# Altium PCB PCB1.PcbDoc
Units mm, origin at the board's own origin, x right, y up, seen from the top; angles counter-clockwise.
Board outline 180.72 x 140.08 mm, 2 copper layers (Top Layer, Bottom Layer); 78 components, 85 nets, 278 pads, 29 vias.
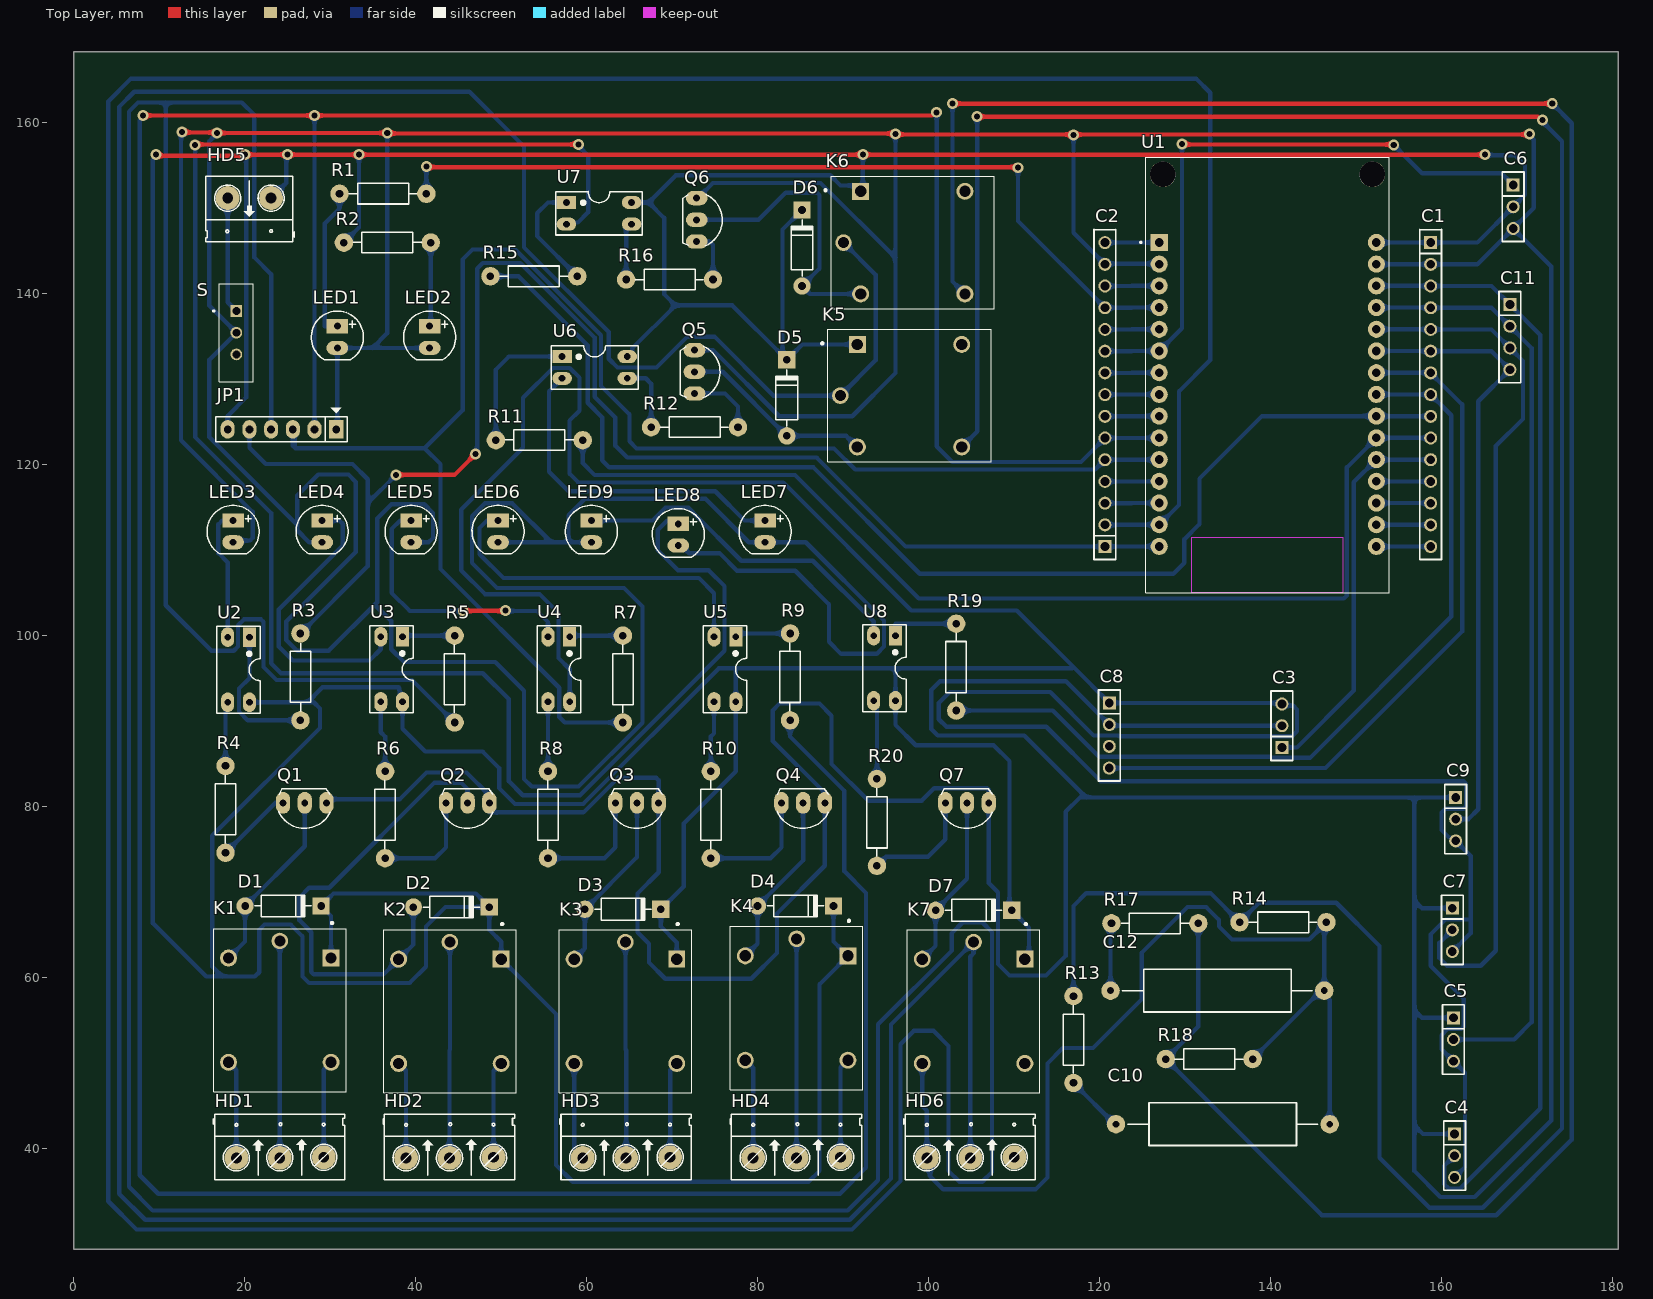
[diagram p0: Top Layer view]
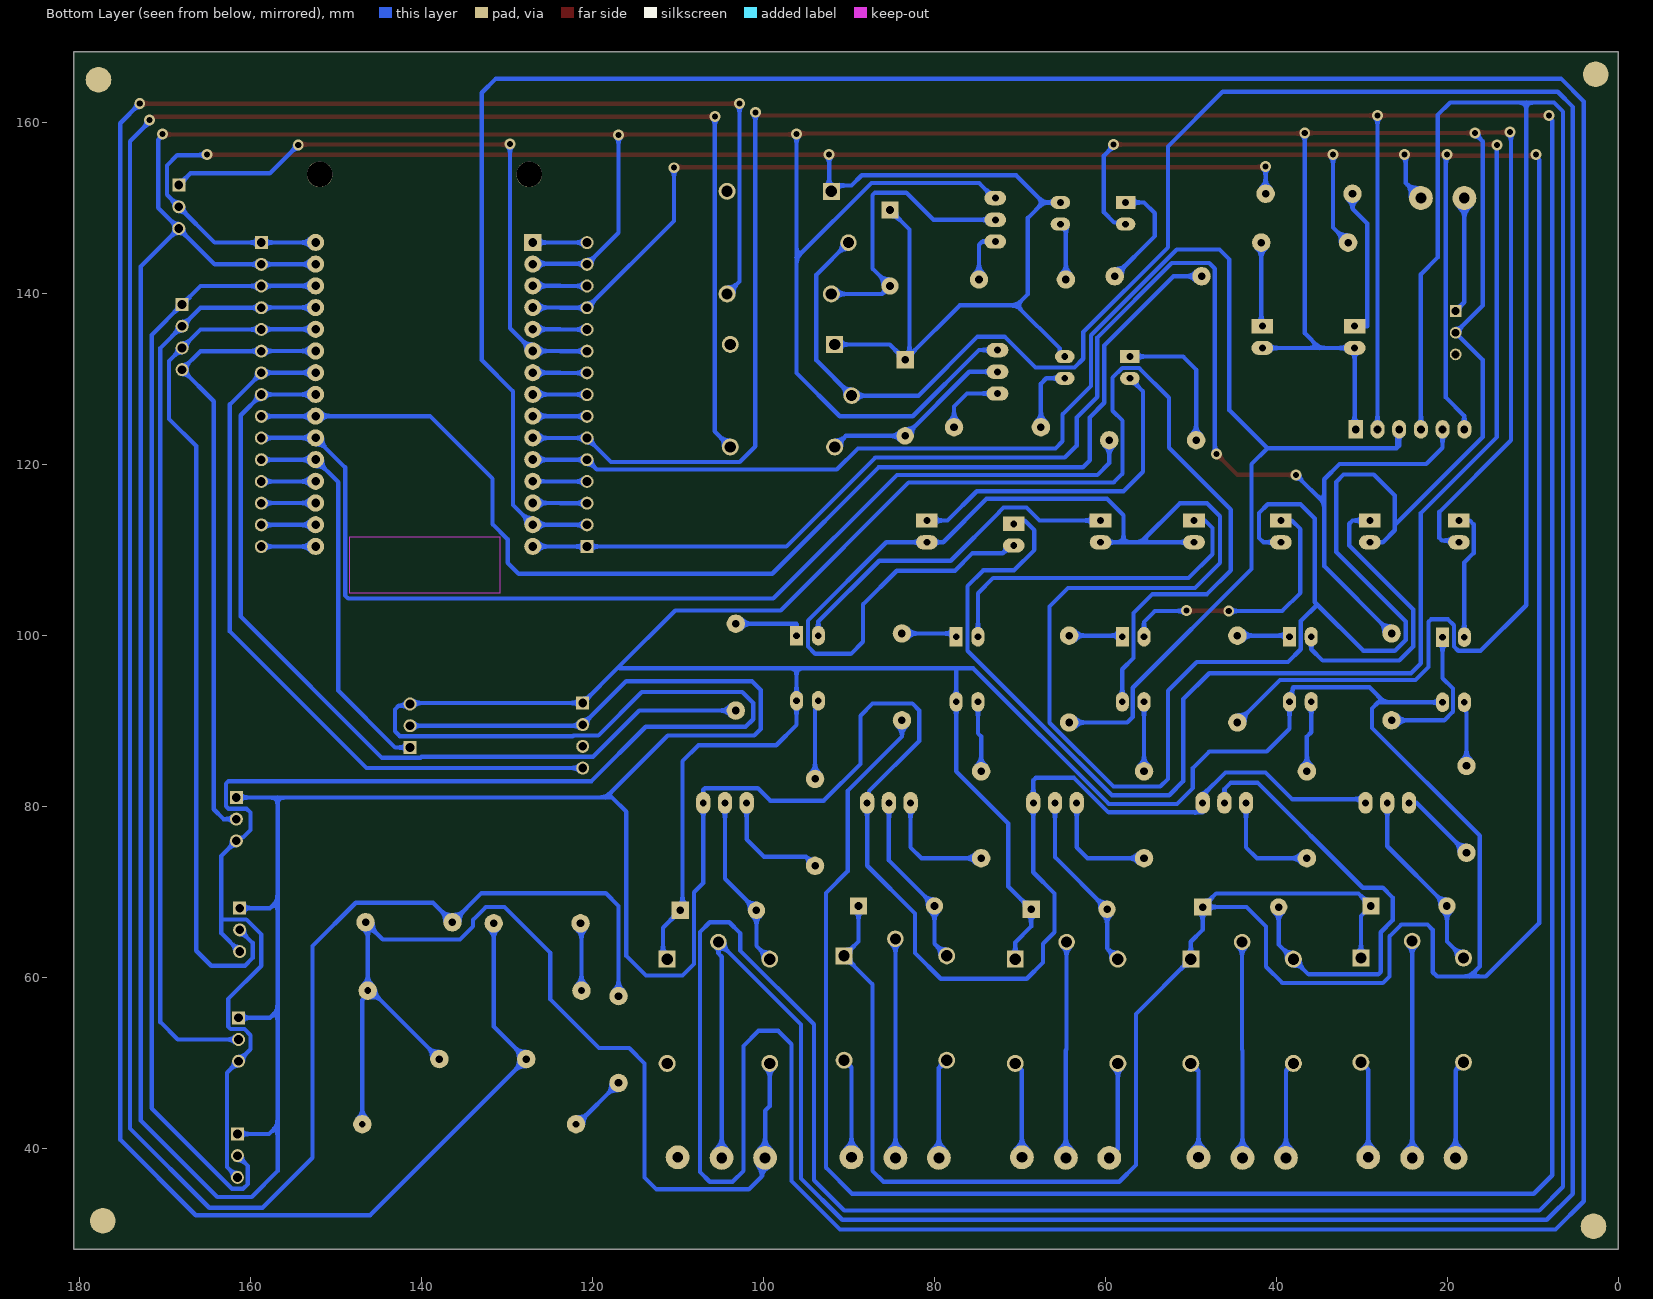
[diagram p1: Bottom Layer view, seen from below]
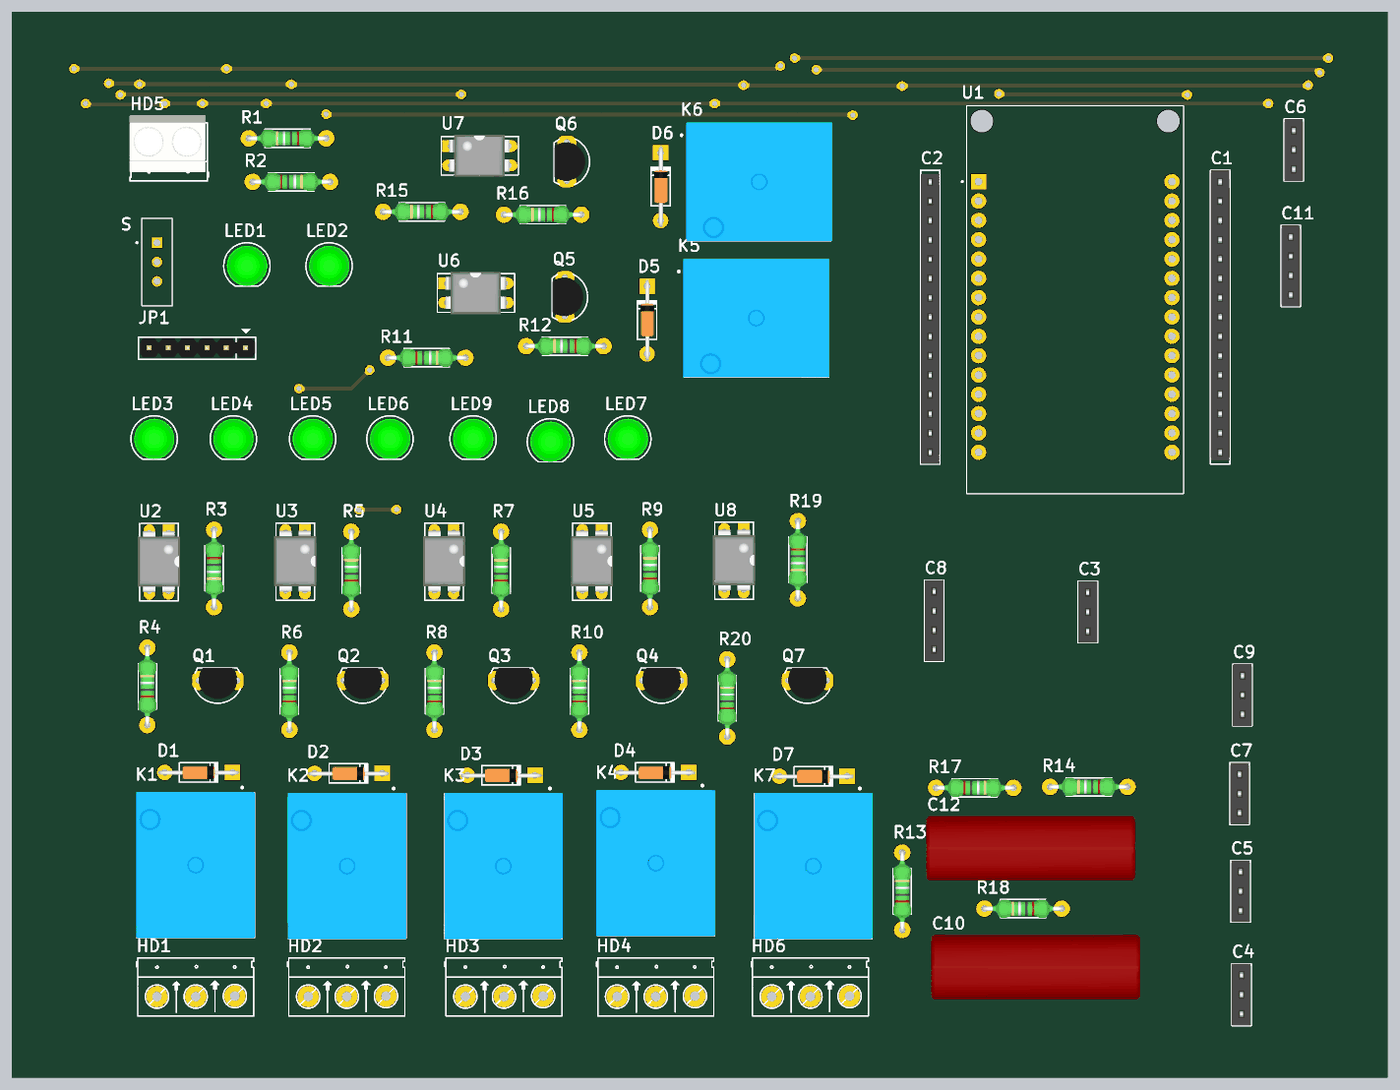
[diagram p2: 3D render of the assembled board from above, using the file's embedded part models]

## Layer stack, top to bottom
Top Solder: solder mask 0.0102, Solder Resist, Dk 3.5
Top Layer: signal copper 0.0356
Dielectric 1: dielectric 0.32, FR-4, Dk 4.8
Bottom Layer: signal copper 0.0356
Bottom Solder: solder mask 0.0102, Solder Resist, Dk 3.5

## Board outline
0,28.194 180.721,28.194 180.721,168.275 0,168.275

## Design rules (kind name [scope] priority, off if disabled: settings)
Clearance [All] p1: gap=0.2 ignorepadtopadclearanceinfootprint=FALSE
HoleSize [All] p1: absolutevalues=TRUE maxlimit=2.54 minlimit=0.7 maxpercent=80.000 minpercent=20.000
PolygonConnect [All] p1: connectstyle=Relief reliefconductorwidth=0.254 reliefentries=4 polygonreliefangle="90 Angle" airgapwidth=0.254
RoomDefinition Sheet2 [InComponentClass('Sheet2')] p1: confinementstyle=ConfineIn formatcopy=TRUE lockcomponents=FALSE outline 0,0 50.8,0 50.8,25.4 0,25.4
RoutingVias [All] p1: holewidth=0.711 width=1.27 viastyle="Through Hole" minholewidth=0.711 minwidth=1.27 maxholewidth=0.711 maxwidth=1.27
SolderMaskExpansion [All] p1: expansion=0.102 istentingtop=FALSE
Width [All] p1: maxlimit=0.5 minlimit=0.4 preferedwidth=0.5
29 further rules are at their usual default settings.

## Classes and differential pairs
component class Sheet2: Q8

## Components (designator, comment, footprint, x,y, rotation, side; value= is the part's Value field where it differs from the comment)
C1 "JP15" JP15-C1T 158.75,145.923 r270 top value=C1815 (schematic designator Q8)
C2 "JP15" JP15-C1T 120.65,110.363 r90 top
C3 "IR Remote" JP3-C1T 141.351,86.868 r90 top
C4 "Switch1" JP3-C1T 161.544,41.656 r270 top
C5 "Switch2" JP3-C1T 161.417,55.245 r270 top
C6 "DHT11" JP3-C1T 168.402,152.654 r270 top
C7 "Switch3" JP3-C1T 161.29,68.072 r270 top
C8 "GAS" JP4-C1T 121.158,92.075 r270 top
C9 "Switch4" JP3-C1T 161.671,81.026 r270 top
C10 "2.2uF/450V" Capacitor_CBB 146.939,42.799 r180 top value=220uF/450V
C11 "JP4" JP4-C1T 168.021,138.684 r270 top
C12 "3.3uF/450V" Capacitor_CBB 146.304,58.42 r180 top value=220uF/450V
D1 "1N4007" D1A 20.066,68.326 r180 top
D2 "1N4007" D1A 39.751,68.199 r180 top
D3 "1N4007" D1A 59.817,67.945 r180 top
D4 "1N4007" D1A 80.01,68.326 r180 top
D5 "1N4007" D1A 83.439,123.317 r270 top
D6 "1N4007" D1A 85.217,140.843 r270 top
D7 "1N4007" D1A 100.838,67.818 r180 top
HD1 "Header 3" HED3 19.05,38.862 r0 top
HD2 "Header 3" HED3 38.904,38.862 r0 top
HD3 "Header 3" HED3 59.563,38.862 r0 top
HD4 "Header 3" HED3 79.502,38.862 r0 top
HD5 "Header 2" HED2 23.114,151.13 r180 top
HD6 "Header 3" HED3 99.822,38.862 r0 top
JP1 "JP6 PIN" JP6 30.734,124.079 r180 top value=JP7
K1 "SRD-05VDC-SL-C" RELAY_SRD-05VDC-SL-C 24.13,56.134 r270 top
K2 "SRD-05VDC-SL-C" RELAY_SRD-05VDC-SL-C 44.027,56.007 r270 top
K3 "SRD-05VDC-SL-C" RELAY_SRD-05VDC-SL-C 64.558,56.007 r270 top
K4 "SRD-05VDC-SL-C" RELAY_SRD-05VDC-SL-C 84.582,56.388 r270 top
K5 "SRD-05VDC-SL-C" RELAY_SRD-05VDC-SL-C 97.79,128.016 r0 top
K6 "SRD-05VDC-SL-C" RELAY_SRD-05VDC-SL-C 98.171,145.923 r0 top
K7 "SRD-05VDC-SL-C" RELAY_SRD-05VDC-SL-C 105.283,56.007 r270 top
LED1 "LED_WIFI" "LED-5 GRe" 30.861,136.144 r270 top value="LED 3 ly Single Colour"
LED2 "LED_POWER" "LED-5 GRe" 41.656,136.144 r270 top value="LED 3 ly Single Colour"
LED3 "LED" "LED-5 GRe" 18.669,113.411 r270 top value="LED 3 ly Single Colour"
LED4 "LED_RELAY2_ON" "LED-5 GRe" 29.083,113.411 r270 top value="LED 3 ly Single Colour"
LED5 "LED" "LED-5 GRe" 39.497,113.411 r270 top value="LED 3 ly Single Colour"
LED6 "LED" "LED-5 GRe" 49.657,113.411 r270 top value="LED 3 ly Single Colour"
LED7 "LED" "LED-5 GRe" 80.899,113.411 r270 top value="LED 3 ly Single Colour"
LED8 "LED" "LED-5 GRe" 70.739,113.03 r270 top value="LED 3 ly Single Colour"
LED9 "LED" "LED-5 GRe" 60.579,113.411 r270 top value="LED 3 ly Single Colour"
Q1 "2SC1815" TO92-123 27.051,80.391 r180 top value=C1815
Q2 "2SC1815" TO92-123 46.101,80.391 r180 top value=C1815
Q3 "2SC1815" TO92-123 65.913,80.391 r180 top value=C1815
Q4 "2SC1815" TO92-123 85.344,80.391 r180 top value=C1815
Q5 "2SC1815" TO92-123 72.644,130.81 r270 top value=C1815
Q6 "2SC1815" TO92-123 72.898,148.59 r270 top value=C1815
Q7 "2SC1815" TO92-123 104.521,80.391 r180 top value=C1815
R1 "Res" RES-1/4W 36.576,151.511 r0 top
R2 "Res" RES-1/4W 36.322,146.05 r180 top
R3 "Res" RES-1/4W 26.67,95.504 r90 top
R4 "Res" RES-1/4W 17.653,79.248 r270 top
R5 "Res" RES-1/4W 44.45,94.488 r270 top
R6 "Res" RES-1/4W 36.322,78.613 r270 top
R7 "Res" RES-1/4W 64.135,94.488 r270 top
R8 "Res" RES-1/4W 55.372,78.613 r270 top
R9 "Res" RES-1/4W 83.693,94.742 r270 top
R10 "Res" RES-1/4W 74.422,78.613 r270 top
R11 "Res" RES-1/4W 54.102,122.936 r180 top
R12 "Res" RES-1/4W 73.025,124.206 r0 top
R13 "Res" RES-1/4W 116.84,52.324 r270 top
R14 "Res" RES-1/4W 141.859,66.294 r0 top
R15 "Res" RES-1/4W 54.229,141.859 r0 top
R16 "Res" RES-1/4W 70.104,141.478 r0 top
R17 "Res" RES-1/4W 126.111,66.421 r180 top
R18 "Res" RES-1/4W 133.223,50.292 r0 top
R19 "Res" RES-1/4W 103.378,96.647 r90 top
R20 "Res" RES-1/4W 93.853,77.724 r270 top
S "SS-12E17" SW_SS-12E17 19.05,135.382 r0 top
U1 "ESP32-DEVKIT-V1" MODULE_ESP32_DEVKIT_V1 139.7,130.429 r0 top
U2 "PC817" DIP4/W0.3 20.574,99.771 r180 top
U3 "PC817" DIP4/W0.3 38.481,99.822 r180 top
U4 "PC817" DIP4/W0.3 58.039,99.822 r180 top
U5 "PC817" DIP4/W0.3 77.47,99.822 r180 top
U6 "PC817" DIP4/W0.3 57.15,132.588 r270 top
U7 "PC817" DIP4/W0.3 57.658,150.622 r270 top
U8 "PC817" DIP4/W0.3 96.139,99.949 r180 top

## Footprints (in the part's own frame and the unit in brackets; to place one, negate y for a bottom-side part, rotate by r counter-clockwise, add the part's x,y. Pads: shape width x height; smd on the part's side, far side on the other; paste and mask are expansions set on the pad)
Capacitor_CBB [mil]
  round 85 hole 31.5: 1(0,0) 2(984.25,0)
  silkscreen extent 55,-98 929,98, body extent -51,-165 1031,170, height 649
D1A [mil] "Diode 1A, W 100mil, L 350mil"
  round 80 hole 35: 1(0,0)
  rect 80x80 hole 35: 2(-350,0)
  silkscreen extent -305,-50 -45,50, body extent -386,-33 34,36, height 84
DIP4/W0.3 [mil] "4 PIN, W 300mil, Pin to pin 100mil"
  rect 60x90 hole 31: 1(0,0)
  oval 60x90 hole 31: 2(100,0) 3(100,300) 4(0,300)
  silkscreen extent -50,-50 150,350, body extent -59,-10 159,305, height 170
HED2 [mil] "Header 2, 2 pin, hight 300mil, Pin to Pin 200, Colour Green"
  round 110 hole 50: 1(0,0) 2(200,0)
  silkscreen extent -106,-100 300,200, body extent -92,-140 302,155, height 394
HED3 [mil] "Header 3, 3 pin, hight 300mil, Pin to Pin 200, Colour Green"
  round 110 hole 50: 1(0,0) 2(200,0) 3(402.62,2.62)
  silkscreen extent -106,-100 500,200
JP3-C1T [mm] "3 row, straight, gold plating"
  rect 1.52x1.52 hole 1.02: 1(0,0)
  round 1.52 hole 1.02: 2(2.54,0) 3(5.08,0)
  silkscreen extent -1.52,-1.27 6.6,1.27, body extent -1.52,-1.25 6.6,1.25, height 8.51
JP4-C1T [mm] "4 row, straight, gold plating"
  rect 1.52x1.52 hole 1.02: 1(0,0)
  round 1.52 hole 1.02: 2(2.54,0) 3(5.08,0) 4(7.62,0)
  silkscreen extent -1.52,-1.27 9.14,1.27, body extent -1.52,-1.25 9.14,1.25, height 8.51
JP6 [mil] "JP6"
  rect 65x85 hole 36: 1(0,0)
  oval 65x85 hole 36: 2(100,0) 3(200,0) 4(300,0) 5(400,0) 6(500,0)
  silkscreen extent -50,-99 556,58, body extent -48,-50 548,48, height 323
JP15-C1T [mm] "15 row, straight, gold plating"
  rect 1.52x1.52 hole 1.02: 1(0,0)
  round 1.52 hole 1.02: 2(2.54,0) 3(5.08,0) 4(7.62,0) 5(10.16,0) 6(12.7,0) 7(15.24,0) 8(17.78,0) 9(20.32,0) 10(22.86,0) 11(25.4,0) 12(27.94,0) 13(30.48,0) 14(33.02,0) 15(35.56,0)
  silkscreen extent -1.52,-1.27 37.08,1.27, body extent -1.52,-1.25 36.58,1.25, height 8.51
"LED-5 GRe" [mil] "LED 2 PIN, 5 ly , Only colour,pin to pin 100mil"
  rect 65x100 hole 32: 1(0,0)
  oval 65x100 hole 32: 2(100,0)
  silkscreen extent -70,-120 154,120, body extent -54,-104 154,105, height 337
MODULE_ESP32_DEVKIT_V1 [mm]
  rect 2x2 / inner round 2 / far side rect 2x2 hole 1.02: 1(-12.7,15.515)
  round 2 hole 1.02: 2(-12.7,12.975) 3(-12.7,10.435) 4(-12.7,7.895) 5(-12.7,5.355) 6(-12.7,2.815) 7(-12.7,0.275) 8(-12.7,-2.265) 9(-12.7,-4.805) 10(-12.7,-7.345) 11(-12.7,-9.885) 12(-12.7,-12.425) 13(-12.7,-14.965) 14(-12.7,-17.505) 15(-12.7,-20.045) 16(12.7,-20.045) 17(12.7,-17.505) 18(12.7,-14.965) 19(12.7,-12.425) 20(12.7,-9.885) 21(12.7,-7.345) 22(12.7,-4.805) 23(12.7,-2.265) 24(12.7,0.275) 25(12.7,2.815) 26(12.7,5.355) 27(12.7,7.895) 28(12.7,10.435) 29(12.7,12.975) 30(12.7,15.515)
  round 3 hole 3 unplated: ""(-12.28,23.475) ""(12.23,23.475)
  Keep-Out Layer region: 8.78,-25.475 -8.91,-25.475 -8.91,-18.985 8.78,-18.985
  Keep-Out Layer region: 8.78,-25.475 -8.91,-25.475 -8.91,-18.985 8.78,-18.985
  silkscreen extent -14.95,-25.47 14.23,25.47
RELAY_SRD-05VDC-SL-C [mm]
  rect 1.98x1.98 / inner round 1.98 / far side rect 1.98x1.98 hole 1.32: A1(-6.1,6)
  round 1.98 hole 1.32: A2(-6.1,-6) NC(6.1,6) NO(6.1,-6)
  round 1.935 hole 1.29: COM(-8.1,0)
  silkscreen extent -10.3,-7.75 9.55,7.75, body extent -9.6,-7.8 9.6,7.8, height 15.8
RES-1/4W [mil]
  round 85 hole 35: 1(-215,5) 2(185,5)
  silkscreen extent -173,-42 141,52, body extent -227,-42 197,52, height 95
SW_SS-12E17 [mm]
  rect 1.37x1.37 hole 0.91: 1(0,2.54)
  round 1.37 hole 0.91: 2(0,0) 3(0,-2.54)
  silkscreen extent -2.75,-5.75 2,5.75
TO92-123 [mil] "TO-92"
  oval 66x100 hole 32: 1(-100,0) 2(0,0) 3(100,0)
  silkscreen extent -117,-65 120,118, body extent -109,-66 109,95, height 245

## Part data
C1: library part 2SC1815, "NPN 600mW, ECB"
C2: "WR-PHD 2.54 mm Angled Socket Header", Manufacturer="W¨¹rth Elektronik eiSos GmbH", partNo=613015143121, ComponentLink1 Description=Manufacturer, ComponentLink1URL=http://www.we-online.com, ComponentLink2 Description=Datasheet, ComponentLink2URL=http://katalog.we-online.de/em/datasheet/6130xx143121.pdf, Created by="Karrer Zheng", Created Date="29 March 2013", NoPins=15
C3 C4 C5 C6 C7 C9: library part JP3, "WR-PHD 2.54 mm Angled Socket Header", Manufacturer="W¨¹rth Elektronik eiSos GmbH", partNo=613003143121, ComponentLink1 Description=Manufacturer, ComponentLink1URL=http://www.we-online.com, ComponentLink2 Description=Datasheet, ComponentLink2URL=http://katalog.we-online.de/em/datasheet/6130xx143121.pdf, Created by="Karrer Zheng", Created Date="29 March 2013", NoPins=03
C8: library part JP4, "WR-PHD 2.54 mm Angled Socket Header", Manufacturer="W¨¹rth Elektronik eiSos GmbH", partNo=613004143121, ComponentLink1 Description=Manufacturer, ComponentLink1URL=http://www.we-online.com, ComponentLink2 Description=Datasheet, ComponentLink2URL=http://katalog.we-online.de/em/datasheet/6130xx143121.pdf, Created by="Karrer Zheng", Created Date="29 March 2013", NoPins=04
C10 C12: library part CP9, "Cap 10000uF/63V"
C11: "WR-PHD 2.54 mm Angled Socket Header", Manufacturer="W¨¹rth Elektronik eiSos GmbH", partNo=613004143121, ComponentLink1 Description=Manufacturer, ComponentLink1URL=http://www.we-online.com, ComponentLink2 Description=Datasheet, ComponentLink2URL=http://katalog.we-online.de/em/datasheet/6130xx143121.pdf, Created by="Karrer Zheng", Created Date="29 March 2013", NoPins=04
D1 D2 D3 D4 D5 D6 D7: library part D1A, "Diode 1A"
HD1 HD2 HD3 HD4 HD6: library part Hed3, "Header 3 (Green)"
HD5: library part Hed2, "Header 2 (Green)"
JP1: library part JP6
K1 K2 K3 K4 K5 K6 K7: "5V Trigger Relay Module For Arduino And Raspberry Pi 5V Trigger Relay Module For Arduino And Raspberry Pi", Package="NON STANDARD-5 Songle Relay", Availability="Not in stock", Check_prices=https://www.snapeda.com/parts/SRD-05VDC-SL-C/Songle+Relay/view-part/?ref=eda, MF="Songle Relay", MP=SRD-05VDC-SL-C, Price=None, SnapEDA_Link=https://www.snapeda.com/parts/SRD-05VDC-SL-C/Songle+Relay/view-part/?ref=snap
LED1 LED2 LED4: library part LED, "LED Single colour Green and Red"
LED3 LED5 LED6 LED7 LED8 LED9: "LED Single colour Green and Red"
Q1 Q2 Q3 Q4 Q5 Q6 Q7: "NPN 600mW, ECB"
R1 R2 R3 R4 R5 R6 R7 R8 R9 R10 R11 R12 R13 R14 R15 R16 R17 R18 R19 R20: Manufacturer="Generic Components", Class=Passive, Published=08/06/2000, Publisher="Altium Hobart Technology Centre", SubClass=R
S: "3-Pin SPDT Slide Switch", Package=None, Availability=Unavailable, MF="Jameco Valuepro", MP=SS-12E17, Price=None, SnapEDA_Link=https://www.snapeda.com/parts/SS-12E17/Jameco%20Valuepro/view-part/842561/?ref=snap
U1: "Dual core, Wi-Fi: 2.4 GHz up to 150 Mbits/s,BLE (Bluetooth Low Energy) and legacy Bluetooth, 32 bits, Up to 240 MHz", Package=None, Availability="Not in stock", Check_prices=https://www.snapeda.com/parts/ESP32-DEVKIT-V1/Do+it/view-part/?ref=eda, MF="Do it", MP=ESP32-DEVKIT-V1, Price=None, SnapEDA_Link=https://www.snapeda.com/parts/ESP32-DEVKIT-V1/Do+it/view-part/?ref=snap
U2 U3 U4 U5 U6 U7 U8: "Single Opto"

## Free pads (board coordinates)
  round 3 smd far side: ""(2.667,165.608) ""(2.921,30.861) ""(177.292,31.496) ""(177.8,164.973)

## Via types
v1: diameter 1.27, hole 0.711, Top Layer to Bottom Layer, 29 vias

## Nets (pads, with @x,y where several pads share a name; then routed paths per layer and width w, separated by ;. In a path a pad name is that pad's centre, name@x,y a point inside that pad or via, vN(x,y) a via of type N, cw(c..) or ccw(c..) an arc to the next point about the centre after c; other vN are vias at no path point)
3.3V: C2.15 U1.1 | length 6.4
  Bottom Layer w0.5: C2.15 124.527,145.923 124.548,145.944 U1.1
D2: C2.12 R1.2 U1.4 | length 99.4
  Top Layer w0.5: v1(41.275,154.813) 41.338,154.749 110.426,154.749 v1(110.49,154.686)
  Bottom Layer w0.5: R1.2 v1(41.275,154.813) ; v1(110.49,154.686) 110.49,148.463 C2.12 123.8,138.303 123.821,138.324 U1.4
D4: C2.11 U1.5 | length 6.4
  Bottom Layer w0.5: C2.11 123.8,135.763 123.821,135.784 U1.5
D5: C2.8 U1.8 | length 6.4
  Bottom Layer w0.5: C2.8 123.8,128.143 123.821,128.164 U1.8
D12: C1.4 C5.2 C11.2 U1.27 | length 108.9
  Bottom Layer w0.5: U1.27 C1.4@158.729,138.324 ; C1.4 165.862,138.303 C11.2 170.561,133.604 170.561,54.737 168.529,52.705 C5.2
D13: C1.3 C4.2 C11.1 U1.28 | length 131.2
  Bottom Layer w0.5: U1.28 C1.3@158.729,140.864 ; C1.3 165.862,140.843 C11.1 171.577,135.128 171.577,44.653 162.179,35.255 160.884,35.255 160.325,35.814 160.325,37.897 C4.2
D14: C1.5 C7.2 C11.3 U1.26 | length 100.6
  Bottom Layer w0.5: U1.26 C1.5@158.729,135.784 ; C1.5 165.862,135.763 C11.3 169.545,132.08 169.545,125.298 166.37,122.123 166.37,63.094 164.617,61.341 160.655,61.341 159.766,62.23 159.766,64.008 C7.2
D15: C2.13 U1.3 | length 6.4
  Bottom Layer w0.5: C2.13 123.8,140.843 123.821,140.864 U1.3
D18: C2.7 U1.9 | length 6.4
  Bottom Layer w0.5: C2.7 123.622,125.603 123.643,125.624 U1.9
D19: C2.6 JP1.2 R9.2 U1.10 | length 464
  Top Layer w0.5: v1(8.128,160.782) v1(28.194,160.782) 100.376,160.782 100.757,161.163 v1(100.965,161.163)
  Bottom Layer w0.5: v1(8.128,160.782) 8.128,160.574 7.747,160.193 7.747,36.83 9.906,34.671 89.662,34.671 92.71,37.719 92.71,69.85 90.17,72.39 90.17,81.788 83.82,88.138 R9.2 ; JP1.2 v1(28.194,160.782) ; v1(100.965,161.163) 100.965,122.1 102.796,120.269 117.856,120.269 C2.6 126.979,123.063 U1.10
D21: C2.5 JP1.3 R7.2 U1.11 | length 187.7
  Bottom Layer w0.5: R7.2 57.455,89.789 56.82,90.424 56.82,93.853 42.926,107.747 42.926,120.011 41.068,121.869 ; U1.11 127,120.523 C2.5 119.507,119.38 91.44,119.38 88.969,121.851 65.855,121.851 65.024,122.682 65.024,125.832 61.697,129.159 61.697,135.088 51.675,145.11 46.681,145.11 45.517,143.946 45.517,126.318 41.068,121.869 ; 25.959,121.869 41.068,121.869 ; 25.959,121.869 25.654,122.174 JP1.3 25.959,121.869
D22: C2.2 JP1.4 R5.2 U1.14 | length 900.2
  Bottom Layer w0.5: JP1.4 23.114,142.215 21.151,144.178 21.151,160.84 19.685,162.306 10.795,162.306 ; R5.2 39.599,94.767 23.749,94.767 22.225,96.291 22.225,101.561 21.932,101.854 19.952,101.854 19.253,101.155 19.253,98.679 18.745,98.171 16.129,98.171 10.795,103.505 10.795,162.306 ; C2.2 123.8,112.903 123.821,112.924 U1.14 129.311,115.235 129.311,128.524 132.969,132.182 132.969,163.449 131.318,165.1 6.731,165.1 4.064,162.433 4.064,33.782 7.366,30.48 91.059,30.48 96.737,36.158 96.737,52.16 98.298,53.721 100.584,53.721 102.362,51.943 102.362,37.338 103.632,36.068 106.299,36.068 107.442,37.211 107.442,65.278 106.299,66.421 104.013,66.421 102.743,65.151 102.743,63.119 94.107,54.483 94.107,36.248 90.563,32.704 9.256,32.704 6.477,35.483 6.477,161.24 7.543,162.306 10.795,162.306
D23: C2.1 JP1.5 R3.2 U1.15 | length 175.4
  Top Layer w0.5: v1(37.706,118.758) 44.564,118.758 v1(47.003,121.196)
  Bottom Layer w0.5: JP1.5 20.574,121.92 22.479,120.015 32.639,120.015 34.417,118.237 34.417,115.468 ; R3.2 34.417,108.077 34.417,115.468 ; v1(37.706,118.758) 34.417,115.468 ; v1(47.003,121.196) 47.219,121.412 47.219,142.875 47.879,143.535 52.26,143.535 60.96,134.835 60.96,127.889 63.373,125.476 63.373,122.174 64.77,120.777 86.924,120.777 97.338,110.363 C2.1 123.8,110.363 123.821,110.384 U1.15
D25: C1.8 R19.1 U1.23 | length 100.3
  Bottom Layer w0.5: R19.1 114.536,91.186 119.946,85.776 140.005,85.776 140.132,85.649 144.632,85.649 161.163,102.18 161.163,125.73 C1.8 ; U1.23 C1.8@158.729,128.164
D26: C1.7 C8.4 U1.24 | length 86
  Bottom Layer w0.5: C8.4 121.668,84.455 121.668,84.457 146.458,84.457 162.433,100.432 162.433,127 C1.7 ; U1.24 C1.7@158.729,130.704
D27: C1.6 C9.2 C11.4 U1.25 | length 72.6
  Bottom Layer w0.5: U1.25 C1.6@158.729,133.244 ; C1.6 165.862,133.223 C11.4 164.313,127.356 164.313,79.633 163.166,78.486 C9.2
D32: C1.10 R11.1 U1.21 | length 125
  Bottom Layer w0.5: R11.1 59.563,120.142 60.96,118.745 84.402,118.745 98.864,104.283 148.581,104.283 148.946,104.648 148.946,119.63 U1.21 C1.10@158.729,123.084
D33: C1.9 R15.1 U1.22 | length 143.6
  Bottom Layer w0.5: R15.1 52.047,141.986 60.143,133.89 60.143,127.182 61.849,125.476 61.849,120.451 62.666,119.634 86.55,119.634 98.996,107.188 128.651,107.188 129.921,108.458 129.921,111.211 131.699,112.989 131.699,118.313 139.01,125.624 U1.22 ; U1.22@152.421,125.603 C1.9
D34: C1.12 U1.19 | length 6.3
  Bottom Layer w0.5: U1.19@152.421,117.983 C1.12
D35: C1.11 C3.1 U1.20 | length 45.6
  Bottom Layer w0.5: C3.1 143.102,86.868 149.758,93.525 149.758,117.902 U1.20 ; U1.20@152.421,120.523 C1.11
EN: C1.15 U1.16 | length 6.3
  Bottom Layer w0.5: U1.16@152.421,110.363 C1.15
FAN_COM: HD6.2 K5.COM K6.COM K7.COM | length 410.5
  Bottom Layer w0.5: K6.COM 93.83,142.164 93.83,132.156 K5.COM 81.875,128.016 74.967,134.925 71.806,134.925 68.199,131.318 63.627,131.318 62.611,132.334 62.611,135.458 52.705,145.364 52.705,157.175 46.304,163.576 7.112,163.576 5.334,161.798 5.334,34.671 8.382,31.623 90.805,31.623 95.631,36.449 95.631,54.455 K7.COM 105.283,62.763 104.902,62.382 HD6.2
FAN_NO: C10.1 C12.1 HD6.1 K7.NO R14.2 R18.2 | length 123.4
  Bottom Layer w0.5: K7.NO 99.283,44.913 99.822,44.374 HD6.1 100.191,38.493 100.191,36.715 101.727,35.179 112.522,35.179 113.919,36.576 113.919,49.911 115.718,51.71 119.249,51.71 124.943,57.404 124.943,62.84 130.302,68.199 132.486,68.199 133.985,66.7 133.985,65.938 135.509,64.414 144.551,64.414 R14.2@146.304,66.167 ; R18.2 145.923,58.42 C12.1 ; R14.2 R14.2@146.304,66.167 ; C10.1 146.939,57.336 146.304,57.971 C12.1 ; C12.1 R14.2@146.304,66.167
GND: C1.2 C2.14 C3.2 C4.1 C5.1 C6.3 C7.1 C8.2 C9.1 JP1.1 LED1.2 LED2.2 LED3.2 LED4.2 LED5.2 LED6.2 LED7.2 LED8.2 LED9.2 Q1.1 Q2.1 Q3.1 Q4.1 Q5.1 Q6.1 Q7.1 S.2 U1.2 U1.29 | length 1221.2
  Top Layer w0.5: v1(12.7,158.877) 12.763,158.814 16.7,158.814 v1(16.764,158.75) v1(36.703,158.75) 36.767,158.686 95.822,158.686 v1@96.012,158.496 ; v1(96.139,158.623) 96.203,158.559 116.903,158.559 v1(116.967,158.496) 117.03,158.559 170.243,158.559 v1(170.307,158.623)
  Bottom Layer w0.5: v1(12.7,158.877) 12.573,158.75 12.573,122.809 20.955,114.427 20.955,111.358 20.662,111.065 18.863,111.065 LED3.2 ; v1(16.764,158.75) 16.764,158.656 15.875,157.767 15.875,138.557 S.2 15.875,132.207 15.875,123.19 26.162,112.903 ; LED4.2 27.559,110.871 26.162,112.268 26.162,112.903 ; Q1.1 29.591,80.823 38.176,80.823 41.3,83.947 45.974,83.947 48.641,81.28 Q2.1 48.641,79.273 59.639,79.273 63.678,83.312 68.16,83.312 68.453,83.019 Q3.1 68.453,72.263 65.964,69.774 65.964,65.253 67.31,63.906 67.31,61.722 69.215,59.817 79.286,59.817 82.296,62.827 82.296,67.437 87.884,73.025 Q4.1 87.659,80.616 87.659,81.759 81.788,87.63 81.788,91.186 82.601,91.999 87.249,91.999 88.666,90.582 88.666,84.943 92.964,80.645 99.22,80.645 100.686,82.111 106.865,82.111 107.061,81.915 Q7.1 107.061,71.013 108.142,69.932 108.142,61.53 109.474,60.198 113.767,60.198 116.053,62.484 116.053,79.35 117.729,81.026 118.458,81.026 ; JP1.1 30.861,124.206 LED1.2 34.976,133.604 ; v1(36.703,158.75) 36.703,135.331 34.976,133.604 ; LED5.2 41.529,110.871 42.037,111.379 42.037,114.3 41.021,115.316 37.204,115.316 35.535,113.646 35.535,103.861 35.242,103.569 ; LED2.2 34.976,133.604 ; LED6.2 55.88,110.871 ; LED9.2 57.912,110.871 ; LED8.2@70.739,110.871 70.872,110.871 71.575,110.168 71.575,110.035 72.009,109.601 75.565,109.601 77.622,107.544 84.43,107.544 88.367,103.607 88.367,99.238 89.789,97.815 93.955,97.815 94.818,98.679 94.818,101.702 85.649,110.871 LED7.2 78.994,110.871 73.914,115.951 59.828,115.951 57.912,114.035 57.912,110.871 ; Q5.1 74.803,133.35 82.55,125.603 91.084,125.603 96.139,130.658 96.139,144.145 ; Q6.1 73.011,151.13 74.789,152.908 87.376,152.908 96.139,144.145 ; v1(96.139,158.623) 96.139,144.145 ; v1(116.967,158.496) 116.967,147.066 C2.14 120.719,143.452 126.952,143.452 U1.2 ; C3.2 121.285,89.408 116.078,94.615 101.346,94.615 100.33,93.599 100.33,89.027 101.092,88.265 111.219,88.265 118.458,81.026 ; U1.29@152.421,143.383 164.211,143.383 C6.3 ; C7.1 157.734,68.072 156.845,68.961 ; C5.1 157.734,55.245 156.845,56.134 ; C4.1 157.861,41.656 156.845,42.672 ; C9.1 156.845,81.026 ; v1(170.307,158.623) 170.307,158.453 170.815,157.945 170.815,149.987 C6.3 ; 26.162,112.903 26.162,116.332 28.626,118.796 32.156,118.796 33.02,117.932 33.02,109.734 24.892,101.606 24.892,99.435 26.156,98.171 29.845,98.171 35.242,103.569 ; 35.242,103.569 37.16,101.651 37.16,98.361 38.646,96.876 49.327,96.876 52.705,93.497 52.705,83.185 53.594,82.296 59.08,82.296 66.548,89.764 66.548,103.365 64.389,105.524 49.543,105.524 46.609,108.458 46.609,113.919 48.133,115.443 51.308,115.443 55.88,110.871 ; 55.88,110.871 57.912,110.871 ; 118.458,81.026 156.845,81.026 ; 156.845,42.672 156.845,37.313 159.868,34.29 163.906,34.29 172.847,43.231 172.847,143.129 C6.3 ; 156.845,42.672 156.845,56.134 ; 156.845,56.134 156.845,68.961 ; 156.845,68.961 156.845,81.026
NetC10_2: C10.2 R13.2 | length 7
  Bottom Layer w0.5: R13.2 121.793,42.799 C10.2
NetC12_2: C12.2 R17.2 | length 7.9
  Bottom Layer w0.5: C12.2 121.304,66.186 R17.2
NetD1_1: D1.1 K1.A2 Q1.2 | length 21.9
  Bottom Layer w0.5: K1.A2 20.066,64.17 D1.1 27.051,75.311 Q1.2
NetD2_1: D2.1 K2.A2 Q2.2 | length 54.3
  Bottom Layer w0.5: D2.1 39.751,63.831 K2.A2 36.245,60.325 28.106,60.325 27.813,60.618 27.813,65.253 26.416,66.65 26.416,69.317 27.559,70.46 29.921,70.46 42.215,82.753 45.339,82.753 46.101,81.991 Q2.2
NetD3_1: D3.1 K3.A2 Q3.2 | length 21.3
  Bottom Layer w0.5: K3.A2 59.817,63.366 D3.1 65.913,74.041 Q3.2
NetD4_1: D4.1 K4.A2 Q4.2 | length 20.7
  Bottom Layer w0.5: K4.A2 80.01,63.916 D4.1 85.344,73.66 Q4.2
NetD5_1: D5.1 K5.A2 Q5.2 | length 22.7
  Bottom Layer w0.5: Q5.2 75.946,130.81 D5.1 90.389,123.317 K5.A2
NetD6_1: D6.1 K6.A2 Q6.2 | length 34.5
  Bottom Layer w0.5: Q6.2 80.137,148.59 83.312,151.765 86.956,151.765 87.249,151.472 87.249,142.875 D6.1 86.137,139.923 K6.A2
NetD7_1: D7.1 K7.A2 Q7.2 | length 20.5
  Bottom Layer w0.5: K7.A2 100.838,63.662 D7.1 104.521,71.501 Q7.2
NetHD1_2: HD1.2 K1.COM | length 25.4
  Bottom Layer w0.5: HD1.2 K1.COM
NetHD1_3: HD1.3 K1.NC | length 11.5
  Bottom Layer w0.5: HD1.3 29.277,49.181 K1.NC
NetHD2_2: HD2.2 K2.COM | length 25.3
  Bottom Layer w0.5: HD2.2 43.984,51.46 44.027,51.503 K2.COM
NetHD2_3: HD2.3 K2.NC | length 11.3
  Bottom Layer w0.5: HD2.3 49.131,49.011 K2.NC
NetHD3_2: HD3.2 K3.COM | length 25.3
  Bottom Layer w0.5: K3.COM 64.558,51.545 64.643,51.46 HD3.2
NetHD3_3: HD3.3 K3.NC | length 11.3
  Bottom Layer w0.5: HD3.3 69.789,49.138 K3.NC
NetHD4_2: HD4.2 K4.COM | length 25.6
  Bottom Layer w0.5: HD4.2 K4.COM
NetHD4_3: HD4.3 K4.NC | length 11.7
  Bottom Layer w0.5: HD4.3 89.728,49.434 K4.NC
NetHD5_2: HD5.2 S.1 | length 13.6
  Bottom Layer w0.5: HD5.2 18.034,138.938 S.1
NetK5_NO: K5.NO R13.1 R14.1 | length 328.5
  Top Layer w0.5: v1(105.664,160.655) 171.242,160.655 171.623,160.274 v1(171.831,160.274)
  Bottom Layer w0.5: K5.NO 105.715,123.841 105.715,160.604 v1(105.664,160.655) ; R13.1 116.967,68.326 118.466,69.825 132.994,69.825 R14.1 138.684,68.707 147.701,68.707 152.767,63.641 152.767,38.876 158.623,33.02 164.846,33.02 174.117,42.291 174.117,157.78 171.831,160.066 v1(171.831,160.274)
NetK6_NO: K6.NO R17.1 R18.1 | length 291.3
  Top Layer w0.5: v1(102.819,162.179) v1(172.974,162.179)
  Bottom Layer w0.5: v1(102.819,162.179) 102.819,141.375 K6.NO ; R17.1 131.572,54.229 R18.1 146.025,32.156 166.421,32.156 175.26,40.996 175.26,159.893 v1(172.974,162.179)
NetLED1_1: LED1.1 R1.1 | length 17.7
  Bottom Layer w0.5: LED1.1 29.393,136.144 29.393,148.153 31.115,149.874 R1.1
NetLED2_1: LED2.1 R2.1 | length 9.9
  Bottom Layer w0.5: LED2.1 41.783,136.144 R2.1
NetLED3_1: LED3.1 U2.2 | length 15.6
  Bottom Layer w0.5: U2.2 18.034,108.509 16.942,109.601 16.942,112.966 17.386,113.411 LED3.1
NetLED4_1: LED4.1 U3.2 | length 34.7
  Bottom Layer w0.5: LED4.1 31.115,113.411 31.496,113.03 31.496,110.49 24.003,102.997 24.003,98.672 25.647,97.028 34.608,97.028 35.941,98.361 U3.2
NetLED5_1: LED5.1 U4.2 | length 31.6
  Top Layer w0.5: v1(45.593,102.819) 45.618,102.845 50.521,102.845 v1(50.546,102.87)
  Bottom Layer w0.5: LED5.1 38.214,113.411 37.211,112.408 37.211,104.953 39.345,102.819 v1(45.593,102.819) ; v1@50.546,102.819 54.229,102.819 55.499,101.549 U4.2
NetLED6_1: LED6.1 U5.2 | length 40
  Bottom Layer w0.5: LED6.1 48.374,113.411 47.498,112.535 47.498,109.474 50.292,106.68 73.152,106.68 74.93,104.902 U5.2
NetLED7_1: LED7.1 U6.2 | length 39.2
  Bottom Layer w0.5: U6.2 55.626,128.524 55.626,119.127 57.913,116.84 75.057,116.84 78.486,113.411 LED7.1
NetLED8_1: LED8.1 U7.2 | length 215.1
  Top Layer w0.5: v1(14.224,157.353) 14.282,157.411 v1(59.055,157.411)
  Bottom Layer w0.5: v1(14.224,157.353) 14.224,123.19 23.114,114.3 23.114,96.723 24.282,95.555 47.879,95.555 50.902,92.533 50.902,82.931 52.553,81.28 59.249,81.28 76.149,98.18 76.149,105.74 74.295,107.594 70.714,107.594 68.326,109.982 68.326,112.281 69.456,113.411 LED8.1@70.739,113.411 ; U7.2 57.84,148.264 58.995,148.264 60.198,149.466 60.198,156.083 59.055,157.226 v1(59.055,157.411)
NetLED9_1: LED9.1 U8.2 | length 40.9
  Bottom Layer w0.5: LED9.1 67.717,113.411 69.241,114.935 71.947,114.935 72.459,114.423 72.459,114.358 78.105,108.712 86.481,108.712 93.599,101.594 U8.2
NetQ1_3: Q1.3 R4.2 | length 9.2
  Bottom Layer w0.5: R4.2 23.622,80.391 Q1.3
NetQ2_3: Q2.3 R6.2 | length 12.8
  Bottom Layer w0.5: R6.2 42.291,73.914 43.561,75.184 Q2.3
NetQ3_3: Q3.3 R8.2 | length 13.6
  Bottom Layer w0.5: R8.2 62.103,73.914 63.373,75.184 Q3.3
NetQ4_3: Q4.3 R10.2 | length 14
  Bottom Layer w0.5: R10.2 81.534,73.914 82.804,75.184 Q4.3
NetQ5_3: Q5.3 R12.2 | length 8.9
  Bottom Layer w0.5: Q5.3 76.2,128.27 77.724,126.746 R12.2@77.724,123.571
NetQ6_3: Q6.3 R16.2 | length 6.1
  Bottom Layer w0.5: Q6.3 74.422,146.05 74.803,145.669 R16.2
NetQ7_3: Q7.3 R20.2 | length 13.6
  Bottom Layer w0.5: R20.2 95.047,74.092 99.949,74.092 101.981,76.124 Q7.3
NetR3_1: R3.1 U2.1 | length 16.8
  Bottom Layer w0.5: U2.1 20.574,94.971 19.355,93.751 19.355,91.059 20.371,90.043 R3.1
NetR4_1: R4.1 U2.3 | length 7.5
  Bottom Layer w0.5: R4.1 17.78,90.965 17.838,91.023 17.838,91.955 U2.3
NetR5_1: R5.1 U3.1 | length 6.2
  Bottom Layer w0.5: U3.1 38.481,99.949 R5.1
NetR6_1: R6.1 U3.3 | length 8.3
  Bottom Layer w0.5: U3.3 35.941,88.646 36.449,88.138 R6.1
NetR7_1: R7.1 U4.1 | length 6.3
  Bottom Layer w0.5: U4.1 58.039,99.949 R7.1
NetR8_1: R8.1 U4.3 | length 8.1
  Bottom Layer w0.5: R8.1 U4.3
NetR9_1: R9.1 U5.1 | length 6.7
  Bottom Layer w0.5: U5.1 77.47,100.203 R9.1
NetR10_1: R10.1 U5.3 | length 8.3
  Bottom Layer w0.5: R10.1 74.549,88.138 74.93,88.519 U5.3
NetR11_2: R11.2 U6.1 | length 16.6
  Bottom Layer w0.5: R11.2 49.403,131.064 50.927,132.588 U6.1
NetR12_1: R12.1 U6.3 | length 8.9
  Bottom Layer w0.5: U6.3 66.929,130.048 67.564,129.413 R12.1 R12.1@67.564,123.571
NetR15_2: R15.2 U7.1 | length 13.3
  Bottom Layer w0.5: U7.1 55.499,150.622 54.229,149.352 54.229,146.685 R15.2
NetR16_1: R16.1 U7.3 | length 7.1
  Bottom Layer w0.5: R16.1 64.643,148.082 U7.3
NetR19_2: R19.2 U8.1 | length 8.5
  Bottom Layer w0.5: U8.1 96.139,101.346 R19.2
NetR20_1: R20.1 U8.3 | length 9.3
  Bottom Layer w0.5: U8.3 93.599,91.671 93.98,91.29 R20.1
NO1: HD1.1 K1.NO | length 11.6
  Bottom Layer w0.5: K1.NO 19.05,49.114 HD1.1
NO2: HD2.1 K2.NO | length 11.4
  Bottom Layer w0.5: K2.NO 38.904,49.029 HD2.1
NO3: HD3.1 K3.NO | length 11.5
  Bottom Layer w0.5: K3.NO 58.558,39.867 HD3.1
NO4: HD4.1 K4.NO | length 11.8
  Bottom Layer w0.5: K4.NO 79.502,49.368 HD4.1
RX0: C2.4 U1.12 | length 6.4
  Bottom Layer w0.5: C2.4 125.73,117.983 125.751,118.004 U1.12
RX2: C2.10 C6.1 U1.6 | length 72.4
  Top Layer w0.5: v1(129.667,157.475) 129.731,157.411 154.368,157.411 v1(154.432,157.348)
  Bottom Layer w0.5: C2.10 123.8,133.223 123.821,133.244 U1.6 129.667,135.911 v1(129.667,157.475) ; v1(154.432,157.348) 157.754,154.026 167.03,154.026 C6.1
TX0: C2.3 U1.13 | length 6.4
  Bottom Layer w0.5: C2.3 123.8,115.443 123.821,115.464 U1.13
TX2: C2.9 U1.7 | length 6.4
  Bottom Layer w0.5: C2.9 123.8,130.683 123.821,130.704 U1.7
VIN: C1.1 C3.3 C4.3 C5.3 C6.2 C7.3 C8.1 C9.3 D1.2 D2.2 D3.2 D4.2 D5.2 D6.2 D7.2 HD5.1 JP1.6 K1.A1 K2.A1 K3.A1 K4.A1 K5.A1 K6.A1 K7.A1 R2.2 U1.30 U2.4 U3.4 U4.4 U5.4 U6.4 U7.4 U8.4 | length 1184.2
  Top Layer w0.5: v1(9.652,156.21) 9.787,156.075 v1@19.804,156.075 ; v1(20.066,156.21) v1@24.892,156.21 ; v1@25.146,156.21 v1(33.401,156.21) v1(92.329,156.21) 164.846,156.21 v1@164.993,156.357
  Bottom Layer w0.5: 9.271,155.621 9.271,66.319 15.519,60.071 17.399,60.071 ; JP1.6 18.034,125.654 20.193,127.813 20.193,156.083 v1(20.066,156.21) ; U2.4 27.381,92.151 ; HD5.1 24.892,152.908 24.892,156.083 v1(25.019,156.21) ; K1.A1 30.13,67.152 D1.2 30.404,69.774 47.066,69.774 D2.2 ; R2.2 33.401,147.701 v1(33.401,156.21) ; U4.4 58.039,96.012 56.718,97.333 56.718,102.591 54.508,104.8 48.14,104.8 45.339,107.602 45.339,114.681 52.578,121.92 52.578,127.775 56.07,131.267 58.039,131.267 59.182,130.124 59.182,126.263 58.014,125.095 58.014,118.897 59.055,117.856 83.033,117.856 97.993,102.895 110.338,102.895 116.967,96.266 ; U6.4 64.874,132.588 65.347,133.061 65.347,133.527 70.402,138.582 ; U7.4 67.285,150.622 ; K3.A1 70.558,64.062 68.707,65.913 D3.2 71.374,70.612 71.374,77.978 77.47,84.074 U5.4 77.47,96.012 77.597,96.139 ; D6.2 82.931,147.447 D5.2@82.931,132.715 ; D4.2 88.9,64.17 K4.A1 87.249,59.155 87.249,37.338 85.979,36.068 58.395,36.068 56.439,38.024 56.439,55.695 K2.A1 50.027,64.146 48.641,65.532 D2.2 ; K5.A1 85.248,134.016 D5.2 D5.2@82.931,132.715 ; v1(92.329,156.21) 92.329,152.181 K6.A1 91.395,152.599 89.717,152.599 88.519,153.797 70.46,153.797 67.285,150.622 ; K7.A1 111.76,62.584 111.76,65.786 D7.2 109.474,68.072 109.474,85.266 107.618,87.122 98.527,87.122 96.139,89.51 U8.4 96.139,96.139 ; C3.3@141.224,92.075 C8.1 116.967,96.266 ; C3.3 141.546,91.753 142.689,91.753 143.129,91.313 143.129,88.773 142.545,88.189 122.326,88.189 122.25,88.265 119.329,88.265 114.249,93.345 102.489,93.345 101.219,92.075 101.219,90.17 102.108,89.281 113.792,89.281 120.142,82.931 162.597,82.931 162.89,82.638 162.89,79.998 162.597,79.705 160.477,79.705 160.02,79.248 160.02,77.216 160.913,76.323 161.018,76.323 161.395,75.946 C9.3 163.449,74.168 163.449,66.802 ; U1.30@152.421,145.923 164.211,145.923 C6.2 169.799,151.511 169.799,154.94 168.586,156.153 165.157,156.153 v1(165.1,156.21) ; C7.3 163.449,65.151 163.449,66.802 ; C4.3 162.763,37.795 162.763,48.819 C5.3 160.02,51.562 160.02,53.213 160.731,53.924 162.343,53.924 162.636,54.217 162.636,57.455 158.75,61.341 158.75,64.999 160.503,66.751 163.398,66.751 163.449,66.802 ; 17.399,60.071 16.231,61.239 16.231,76.556 28.829,89.154 28.829,91.415 28.092,92.151 27.381,92.151 ; 17.399,60.071 21.209,60.071 21.717,60.579 21.717,65.532 22.352,66.167 25.4,66.167 26.797,64.77 26.797,60.071 27.559,59.309 39.319,59.309 41.224,61.214 41.224,65.913 43.51,68.199 D2.2 ; 27.381,92.151 29.134,93.904 38.036,93.904 U3.4 38.481,89.052 41.148,86.385 47.854,86.385 49.784,84.455 49.784,82.118 51.638,80.264 59.614,80.264 75.489,96.139 77.597,96.139 ; 67.285,150.622 69.088,148.819 69.088,139.896 70.402,138.582 ; 70.402,138.582 77.064,138.582 D5.2@82.931,132.715 ; 77.597,96.139 96.139,96.139 ; 96.139,96.139 116.84,96.139 116.967,96.266
VN: C1.13 U1.18 | length 6.4
  Bottom Layer w0.5: U1.18 158.729,115.464 C1.13
VP: C1.14 U1.17 | length 6.3
  Bottom Layer w0.5: U1.17@152.421,112.903 C1.14
pads on no net: C8.3 HD6.3 K5.NC K6.NC K7.NC S.3 U1.

## Silkscreen, mask and mechanical layers (free items; w line width, h text height)
Mechanical 1:
  the board outline again, w1.2